# Altium PCB n555_pcb.PcbDoc
Units mil, origin at the board's own origin, x right, y up, seen from the top; angles counter-clockwise.
Board outline 3500 x 2000 mil, 2 copper layers (Top Layer, Bottom Layer), stack 61.756 mil thick; 27 components, 17 nets, 70 pads, 1 vias.
Unrouted connection lines stored in the file: 27.
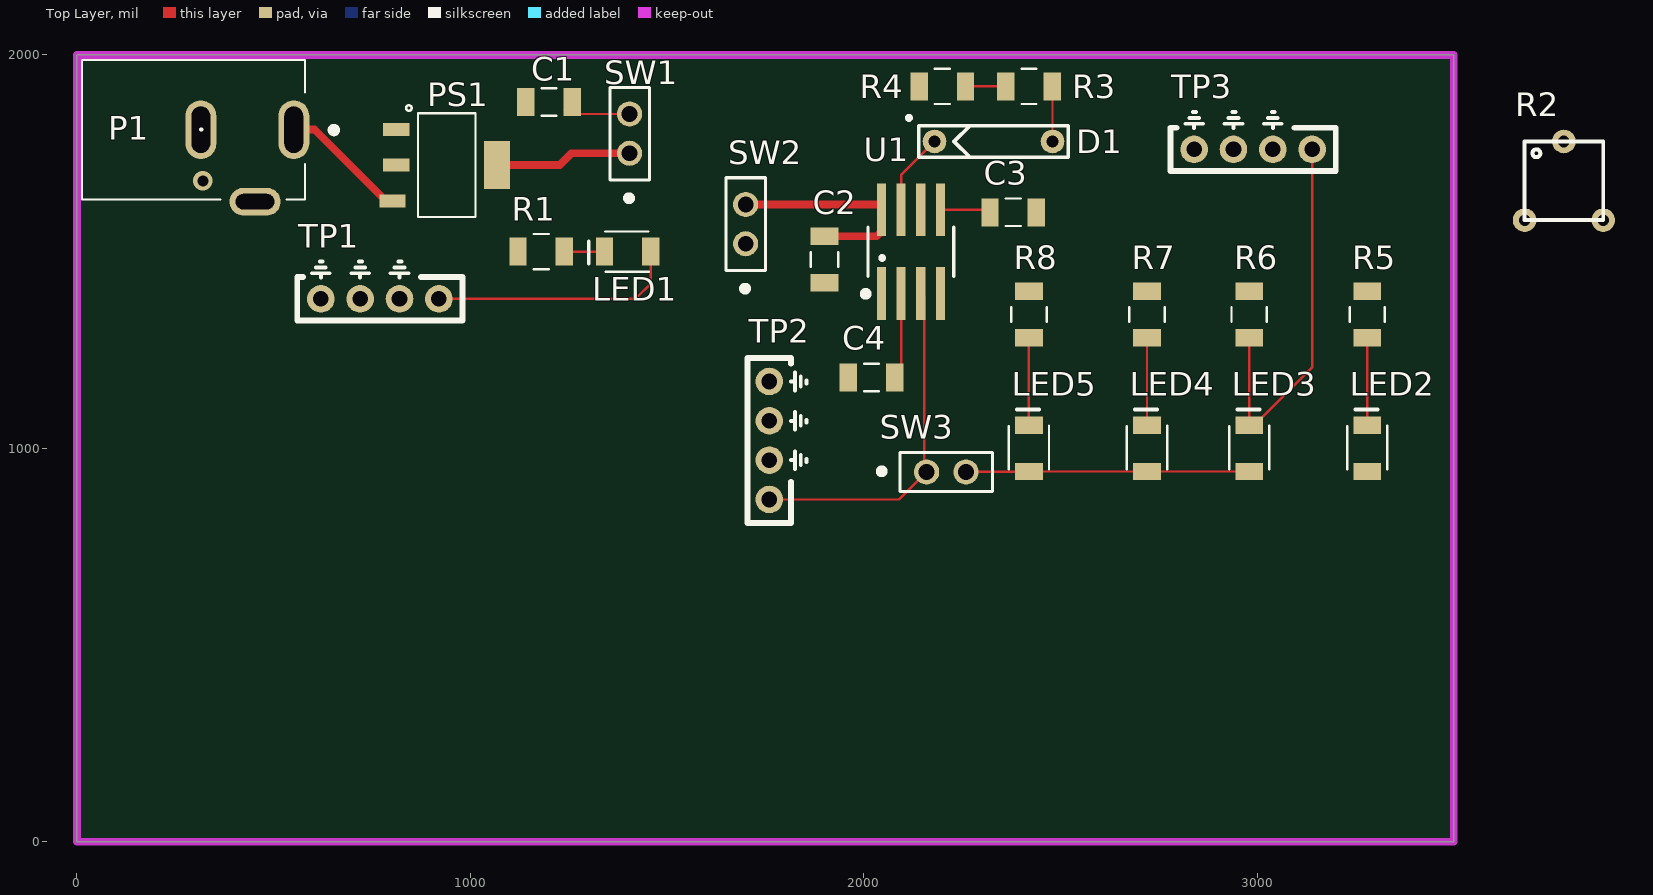
[diagram p0: Top Layer view]
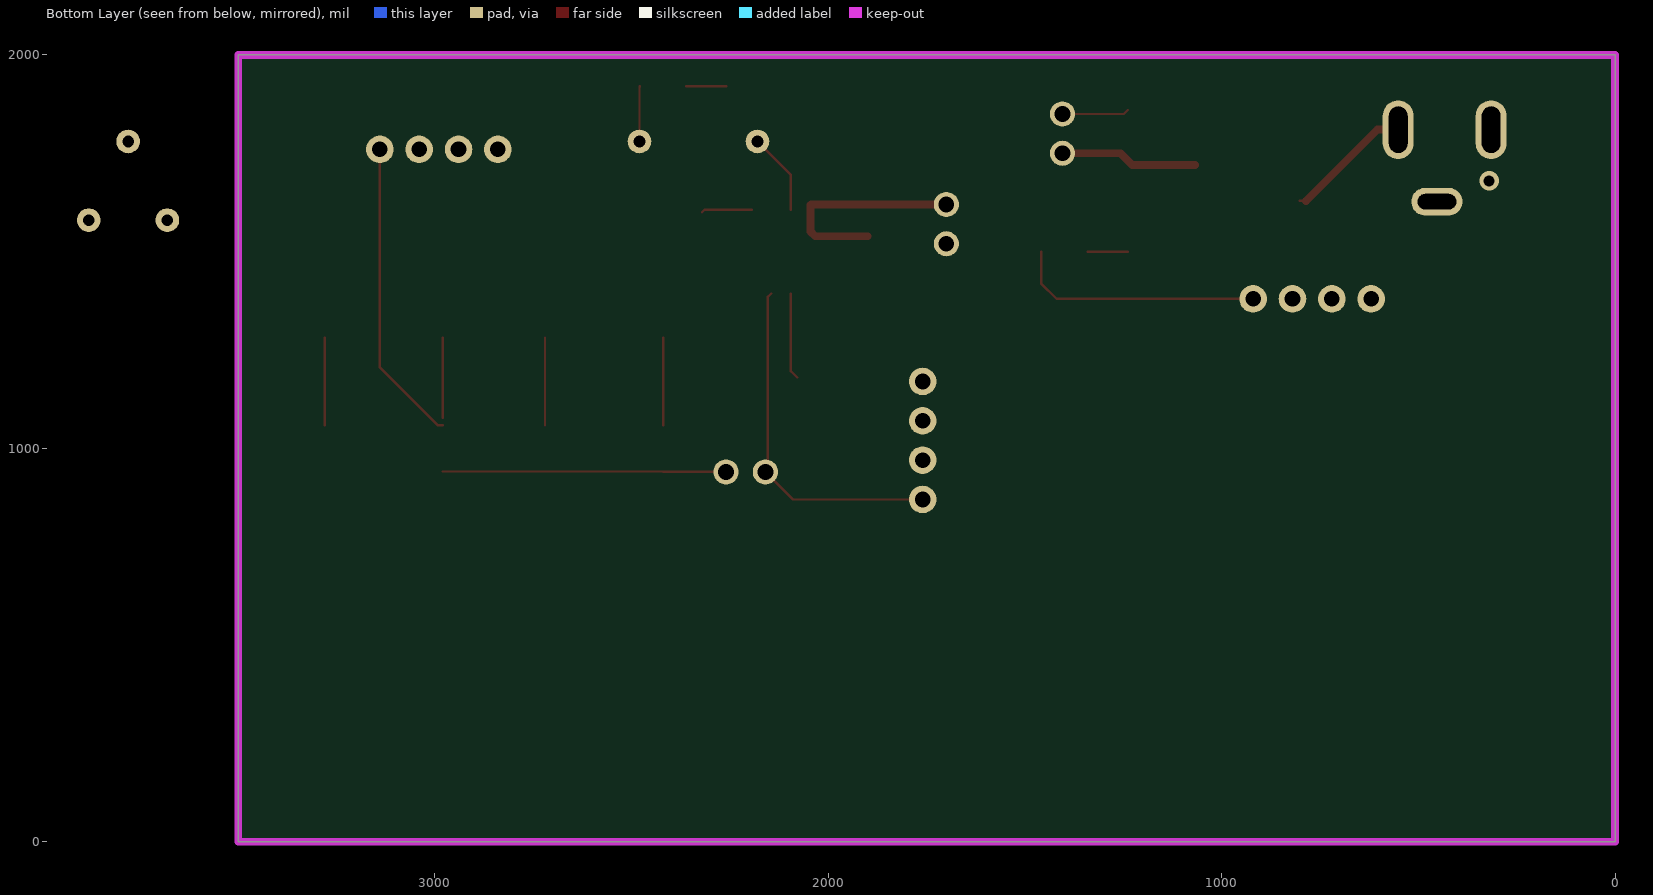
[diagram p1: Bottom Layer view, seen from below]
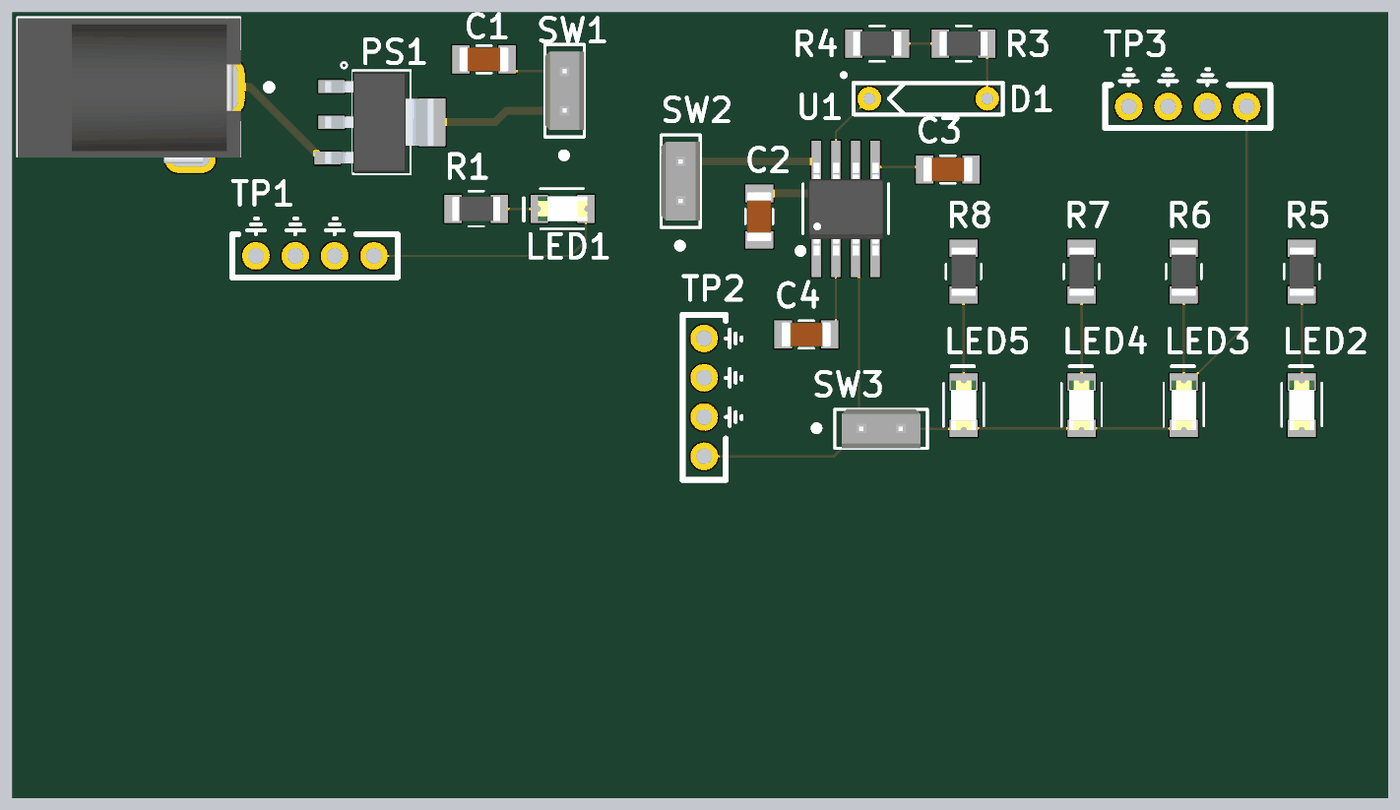
[diagram p2: 3D render of the assembled board from above, using the file's embedded part models]

## Layer stack, top to bottom
Top Solder: solder mask 1, SM-001, Dk 4
Top Layer: signal copper 1.378
Dielectric 1: core 59, Core-043, Dk 4.3
Bottom Layer: signal copper 1.378
Bottom Solder: solder mask 1, SM-001, Dk 4

## Board outline
0,0 3500,0 3500,2000 0,2000

## Design rules (kind name [scope] priority, off if disabled: settings)
Clearance Clearance_1 [OnMid vs OnMid] p1: gap=10 ignorepadtopadclearanceinfootprint=FALSE sourcerule=38 cellrowname=All cellrowtype=0 cellcolname=All cellcoltype=0 innerlayers=TRUE
Clearance Clearance_2 [(ExistsOnLayer('Top Layer') Or ExistsOnLayer('Bottom Layer')) vs (ExistsOnLayer('Top Layer') Or ExistsOnLayer('Bottom Layer'))] p2: gap=10 ignorepadtopadclearanceinfootprint=FALSE sourcerule=38 cellrowname=All cellrowtype=0 cellcolname=All cellcoltype=0 outerlayers=TRUE
Clearance [All] p3: gap=10 ignorepadtopadclearanceinfootprint=FALSE ismatrix=TRUE
PolygonConnect [All] p1: connectstyle=Relief reliefconductorwidth=10 reliefentries=4 polygonreliefangle="90 Angle" airgapwidth=10
RoutingVias [All] p1: holewidth=28 width=50 viastyle="Through Hole" minholewidth=28 minwidth=50 maxholewidth=28 maxwidth=50
SolderMaskExpansion [All] p1: expansion=4 istentingtop=FALSE
UnRoutedNet [All] p1: checkbadconnections=TRUE
Width 5v_width [InNet('555_5v')] p1: maxlimit=100 minlimit=10 preferedwidth=20 minimp=50.000000 maximp=50.000000 favimp=50.000000
Width 5v_width2 [InNet('+5')] p2: maxlimit=100 minlimit=10 preferedwidth=20 minimp=50.000000 maximp=50.000000 favimp=50.000000
Width [All] p3: maxlimit=20 minlimit=6 preferedwidth=6 minimp=50.000000 maximp=50.000000 favimp=50.000000
29 further rules are at their usual default settings.

## Components (designator, comment, footprint, x,y, rotation, side; value= is the part's Value field where it differs from the comment)
C1 "1uF" 1206_Passive_Capacitor 1200,1880 r0 top
C2 "1uF" 1206_Passive_Capacitor 1900,1480 r90 top
C3 "1uF" 1206_Passive_Capacitor 2380,1600 r180 top
C4 "0.1uF" 1206_Passive_Capacitor 2020,1180 r0 top
D1 "diode" "Through hole diode" 2180,1780 r0 top
LED1 "Blue" LED_1206 1400,1500 r180 top
LED2 "Blue" LED_1206 3280,1000 r90 top
LED3 "Blue" LED_1206 2980,1000 r90 top
LED4 "Blue" LED_1206 2720,1000 r90 top
LED5 "Blue" LED_1206 2420,1000 r90 top
P1 "Power Jack" Power_Jack 551.22,1810 r180 top value="CONN PWR JACK 2X5.5MM SOLDER"
PS1 "AMS1117-3.3" LDO 940,1720 r270 top value="IC REG LINEAR 3.3V 800MA SOT223"
R1 "1KOhm" 1206_Passive_Resitor 1180,1500 r0 top
R2 "Potentiometer" potentiometer 3680,1580 r0 top
R3 "10k" 1206_Passive_Resitor 2420,1920 r0 top value=10KOhm
R4 "4.7KOhm" 1206_Passive_Resitor 2200,1920 r0 top
R5 "10KOhm" 1206_Passive_Resitor 3280,1340 r270 top
R6 "1KOhm" 1206_Passive_Resitor 2980,1340 r270 top
R7 "300Ohm" 1206_Passive_Resitor 2720,1340 r270 top
R8 "50Ohm" 1206_Passive_Resitor 2420,1340 r270 top
SW1 "SW_2Pin_100mil_Switch" 2Pin-Header-Conn 1405,1750 r90 top
SW2 "SW_2Pin_100mil_Switch" 2Pin-Header-Conn 1700,1520 r90 top
SW3 "SW_2Pin_100mil_Switch" 2Pin-Header-Conn 2160,940 r0 top
TP1 "10x Probe TP" TP10x_Probe 770,1380 r180 top
TP2 "10x Probe TP" TP10x_Probe 1760,1020 r90 top
TP3 "LED Test probe" TP10x_Probe 2990,1760 r180 top
U1 "LMC555CMX/NOPB" TS555IDTTR 2120,1500 r90 top

## Footprints (in the part's own frame and the unit in brackets; to place one, negate y for a bottom-side part, rotate by r counter-clockwise, add the part's x,y. Pads: shape width x height; smd on the part's side, far side on the other; paste and mask are expansions set on the pad)
2Pin-Header-Conn [mm]
  round 1.62 hole 1.02: 1(0,0) 2(2.54,0)
  silkscreen extent -3.03,-1.27 4.26,1.26, body extent -1.27,-1.27 3.81,1.27, height 8.13
1206_Passive_Capacitor [mil]
  rect 44x71 smd: 1(-59,0) 2(59,0)
  silkscreen extent -19,-35 19,35, body extent -63,-31 63,32, height 50
1206_Passive_Resitor [mil]
  rect 44x71 smd: 1(-59,0) 2(59,0)
  silkscreen extent -19,-45 19,45, body extent -61,-31 61,31, height 26
LDO [mm]
  rect 0.838x1.7 smd: 1(-2.311,-3.25) 2(0,-3.25) 3(2.311,-3.5)
  rect 3.099x1.7 smd: 4(0,3.25)
  silkscreen extent -3.86,-2.62 3.35,1.85, body extent -3.25,-3.65 3.25,3.35, height 1.85
LED_1206 [mil]
  rect 44x71 smd: 1(-59,0) 2(59,0)
  silkscreen extent -54,-51 99,51, body extent -63,-31 63,31, height 28
potentiometer [mil] "3 pin potentiometer , Through hole component"
  round 60 hole 29.53: 10(0,0) 11(200,0) 12(100,200)
  silkscreen extent 0,0 200,200
Power_Jack [mm]
  oval 2x3.8 hole 1.2 slot 3 at 90 deg: 1(0,0) 2(6,0)
  oval 3.3x1.8 hole 1 slot 2.5 at 0 deg: 3(2.5,4.65)
  silkscreen extent -2.79,-4.5 13.68,4.5, body extent -0.76,-4.45 13.64,4.95, height 11.49
"Through hole diode" [mil]
  round 60 hole 29.53: 1(0,0) 1(300,0)
  silkscreen extent -70,-40 340,65
TP10x_Probe [mil] "Small Probs footprint"
  round 70 hole 40: 1(-150,0) 2(-50,0) 2(50,0) 2(150,0)
  silkscreen extent -210,-95 210,55
TS555IDTTR [mm] "IC OSC Single Timer 2.7MHz 8SOIC"
  rect 3.4x0.6 smd: 1(-2.7,1.905) 2(-2.7,0.635) 3(-2.7,-0.635) 4(-2.7,-1.905) 5(2.7,-1.905) 6(2.7,-0.635) 7(2.7,0.635) 8(2.7,1.905)
  silkscreen extent -2.85,-2.77 1.6,3.05, body extent -3.03,-2.48 2.96,2.43, height 1.75

## Part data
C1 C2 C3 C4: library part C_1uF_1206, "MULTILAYER CERAMIC CAPACITORS MLCC - SMD/SMT 1UF 50V 1206 ROHS", LCSC Part#=C1848, MFR Part #=CL31B105KBHNNNE, Digikey Link=https://www.digikey.com/product-detail/en/C1206C105M4RACTU/399-8150-1-ND/3471873/?itemSeq=304982366, Type=Basic
LED1 LED2 LED3 LED4 LED5: library part LED_BLUE_1206, "blue 1206  Light Emitting Diodes (LED) ROHS", LCSC Part#=C130717, MFR Part #=NCD1206B1, Datasheet=https://datasheet.lcsc.com/lcsc/2008201033_Foshan-NationStar-Optoelectronics-NCD1206B1_C130717.pdf, Type=Extended
P1: library part "P_Power Jack", "Power Barrel Connector Jack 2.10mm ID (0.083\"), 5.50mm OD (0.217\") Through Hole, Right Angle", LCSC Part#=C136744, MFR Part #=PJ-102A, Digikey Link=https://www.digikey.com/product-detail/en/PJ-102A/CP-102A-ND/275425/?itemSeq=304982367, Type=Extended
PS1: library part PS_AMS_LDO_3v3, "LOW DROPOUT REGULATORS(LDO) POSITIVE FIXED 1.3V @ 800MA 15V 3.3V 1A SOT-223 ROHS", LCSC Part#=C6186, MFR Part #=AMS1117-3.3, Type=Basic
R1 R6: library part R_4.7k_1206, "1kΩ ±1% 0.25W ±100ppm/℃ 1206 Chip Resistor - Surface Mount RoHS", LCSC Part#=C17936, MFR Part #=1206W4F4701T5E, Datasheet=https://datasheet.lcsc.com/lcsc/1810301414_UNI-ROYAL-Uniroyal-Elec-1206W4F4701T5E_C17936.pdf, Type=Basic
R2: "3 pin potentiometer, Through hole component"
R3: library part R_10KOhm_1206, "10 kOhms ±5% 0.25W, 1/4W Chip Resistor 1206 (3216 Metric) Automotive AEC-Q200 Thick Film", LCSC Part#=C17902, MFR Part #=RMCF1206FT10K0, Digikey Link=https://www.digikey.com/en/products/detail/stackpole-electronics-inc/RMCF1206FT10K0/1759669, Type=Basic
R4 R5: library part R_4.7k_1206, "4.7kΩ ±1% 0.25W ±100ppm/℃ 1206 Chip Resistor - Surface Mount RoHS", LCSC Part#=C17936, MFR Part #=1206W4F4701T5E, Datasheet=https://datasheet.lcsc.com/lcsc/1810301414_UNI-ROYAL-Uniroyal-Elec-1206W4F4701T5E_C17936.pdf, Type=Basic
R7: library part R_4.7k_1206, "300Ω ±1% 0.25W ±100ppm/℃ 1206 Chip Resistor - Surface Mount RoHS", LCSC Part#=C17936, MFR Part #=1206W4F4701T5E, Datasheet=https://datasheet.lcsc.com/lcsc/1810301414_UNI-ROYAL-Uniroyal-Elec-1206W4F4701T5E_C17936.pdf, Type=Basic
R8: library part R_4.7k_1206, "50Ω ±1% 0.25W ±100ppm/℃ 1206 Chip Resistor - Surface Mount RoHS", LCSC Part#=C17936, MFR Part #=1206W4F4701T5E, Datasheet=https://datasheet.lcsc.com/lcsc/1810301414_UNI-ROYAL-Uniroyal-Elec-1206W4F4701T5E_C17936.pdf, Type=Basic
SW1 SW2 SW3: "2Pin Header", LCSC Part#=C124375, Type=Extended
TP1 TP2 TP3: library part TP_10x_Probe, "Test Point 300 mil centers"
U1: library part U_555_Fast, "555 Type, Timer/Oscillator _Single_ IC 3MHz 8-SO", LCSC Part#=C90760, Package=SOIC-8, Digikey Link=https://www.digikey.com/product-detail/en/texas-instruments/LMC555CMX-NOPB/LMC555CMX-NOPBCT-ND/1010550, MFR Part #=LMC555CMX/NOPB, Type=Extended

## Via types
v1: diameter 50, hole 28, Top Layer to Bottom Layer, 1 vias

## Nets (pads, with @x,y where several pads share a name; then routed paths per layer and width w, separated by ;. In a path a pad name is that pad's centre, name@x,y a point inside that pad or via, vN(x,y) a via of type N, cw(c..) or ccw(c..) an arc to the next point about the centre after c; other vN are vias at no path point)
1k_signal: LED3.2 R6.2 TP3.1 | length 978.2
  Top Layer w6: LED3.2 2993.5,1059 3140,1205.5 TP3.1 ; LED3.2@2980,1078 R6.2
555_5v: C2.2 SW2.2 U1.4 U1.8 | length 562.8
  Top Layer w20: SW2.2 2043.19,1620 2045,1618.19 U1.8 2045,1551.18 2032.82,1539 C2.2
+5: PS1.2 PS1.4 SW1.1 | length 349.5
  Top Layer w20: PS1.4 1227.29,1720 1257.29,1750 SW1.1
GND: C1.1 C2.1 C3.1 C4.1 R1.1 R5.1 R6.1 R7.1 R8.1 TP1.2 TP2.2 TP3.2 U1.1
NetC1_2: C1.2 LED1.1 SW1.2 SW2.1 TP1.1 | length 806.3
  Top Layer w6: TP1.1 1420,1380 1459,1419 LED1.1 ; C1.2@1239,1860 1249,1850 SW1.2
NetC3_2: C3.2 U1.5 | length 128.6
  Top Layer w6: U1.5 2314.7,1606.3 C3.2
NetC4_2: C4.2 R4.1 U1.2 U1.6 | length 220.3
  Top Layer w6: C4.2 2095,1196 U1.2
NetD1_1: D1.1 R3.2 U1.7 | length 349.3
  Top Layer w6: U1.7 2095,1695 D1.1@2180,1780 ; R3.2 2480,1919 D1.1@2480,1780
NetLED1_2: LED1.2 R1.2 | length 102
  Top Layer w6: R1.2 LED1.2
NetLED2_1: LED2.1 LED3.1 LED4.1 LED5.1 SW3.2 | length 720.4
  Top Layer w6: SW3.2 2419,940 LED5.1 LED4.1 LED3.1
NetLED2_2: LED2.2 R5.2 | length 222
  Top Layer w6: LED2.2 R5.2
NetLED4_2: LED4.2 R7.2 | length 222
  Top Layer w6: LED4.2 R7.2
NetLED5_2: LED5.2 R8.2 | length 222
  Top Layer w6: LED5.2 R8.2
NetP1_1: P1.1 PS1.3 | length 326
  Top Layer w6: PS1.3@785.24,1629 PS1.3
  Top Layer w20: P1.1 604.24,1810 PS1.3@785.24,1629
NetP1_2: P1.2 PS1.1
NetR3_1: R3.1 R4.2 | length 102
  Top Layer w6: R4.2 R3.1
NetSW3_1: SW3.1 TP2.1 U1.3 | length 888.9
  Top Layer w6: TP2.1 2090,870 SW3.1 2153.81,946.19 2153.81,1384.89 U1.3
pads on no net: P1.3 R2.10 R2.11 R2.12
copper on no net:
  other v1: 320,1680

## Keep-outs
Keep-Out Layer:
  the board outline again, w20